# EAGLE board Arduino_Nano_Clock_Divider_pcb1 (EAGLE 9.1.1)
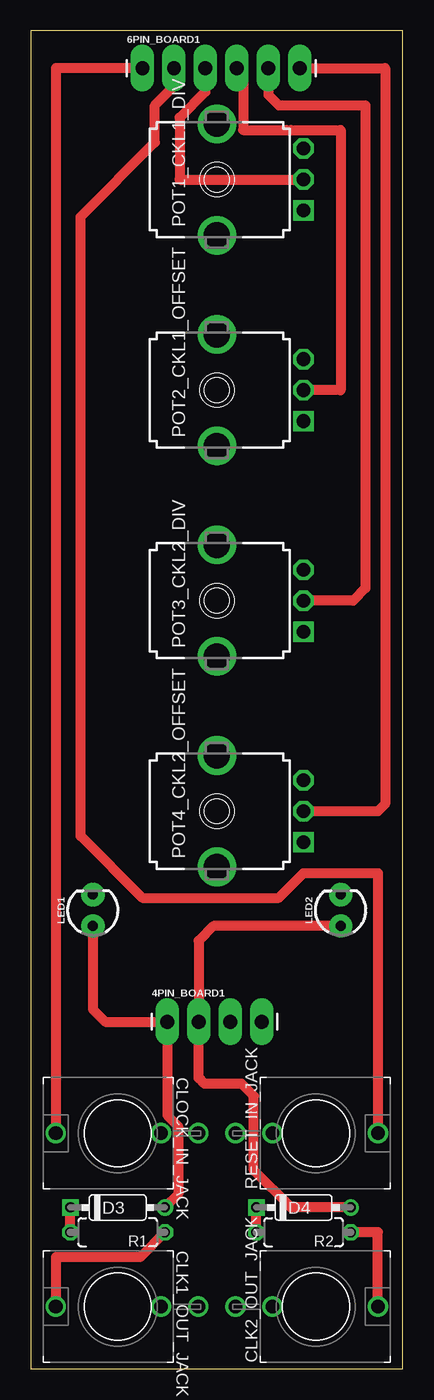
[diagram p0: board, top side]
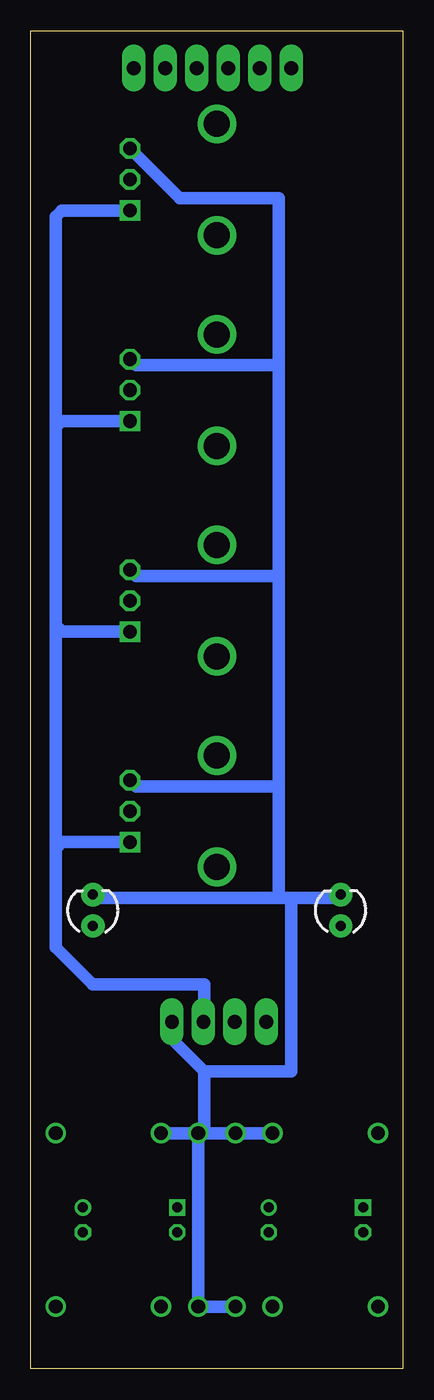
[diagram p1: board, bottom side, seen from below]

Size 30 x 108 mm. Coordinates in mm from the lower left corner, seen from the top.
Outline: 0,0 30,0 30,108 0,108 0,0
Copper layers (1*16): Top 0.035mm / dielectric 1.5mm / Bottom 0.035mm
Design rules "default": minimum track width 6mil, minimum drill 0.35mm, track to track 6mil, track to pad 6mil, pad to pad 6mil, via to via 6mil, smd to smd 6mil, copper to edge 40mil, drill to drill 6mil, minimum pad ring 10mil, minimum via ring 8mil, stop-mask expansion 4mil, vias tented up to drill 0mil, thermal gap 10mil

## Footprints (pad centres in the part's own frame; a part is rotated, then mirrored left to right if it is on the bottom)
1X04_LONGPADS = drill 1.118 pad 1.88 long: 1 0,0; 2 2.54,0; 3 5.08,0; 4 7.62,0
1X06_LONGPADS = drill 1.118 pad 1.88 long: 1 0,0; 2 2.54,0; 3 5.08,0; 4 7.62,0; 5 10.16,0; 6 12.7,0
WQP-PJ301M-12_JACK = drill 1.1: P$1_TIP 0,5; P$2_SWITCH 0,-3.5; P$3_SLEEVE 0,-6.5
DO35-7 = drill 0.813: A 3.81,0 | drill 0.813 square: C -3.81,0
LED_3MM = drill 0.813 pad 1.88: A -1.27,0; K 1.27,0
9MM_SNAP-IN_POT = drill 1.1 square: 1 -2.5,-7 | drill 1.1 octagon: 2 0,-7; 3 2.5,-7 | drill 2.1 pad 2.794: CHASSIS1 -4.5,0; CHASSIS2 4.5,0
7MM_RESISTOR = drill 0.813 octagon: 1 -3.81,0; 2 3.81,0

## Placement (x,y rotation side)
4PIN_BOARD1  [1X04_LONGPADS]  11,28 0 top
6PIN_BOARD1  [1X06_LONGPADS]  9,105 0 top
CLK1_OUT_JACK  THONKICONNNEW  [WQP-PJ301M-12_JACK]  7,5 90 top
CLK2_OUT_JACK  THONKICONNNEW  [WQP-PJ301M-12_JACK]  23,5 270 top
CLOCK_IN_JACK  THONKICONNNEW  [WQP-PJ301M-12_JACK]  7,19 90 top
D3  1N4148  [DO35-7]  7,13 0 top
D4  1N4148  [DO35-7]  22,13 0 top
LED1  [LED_3MM]  5,37 90 top
LED2  [LED_3MM]  25,37 90 top
POT1_CKL1_DIV  100k  [9MM_SNAP-IN_POT]  15,96 90 top
POT2_CKL1_OFFSET  100k  [9MM_SNAP-IN_POT]  15,79 90 top
POT3_CKL2_DIV  100k  [9MM_SNAP-IN_POT]  15,62 90 top
POT4_CKL2_OFFSET  100k  [9MM_SNAP-IN_POT]  15,45 90 top
R1  1k  [7MM_RESISTOR]  7,11 180 top
R2  1k  [7MM_RESISTOR]  22,11 180 top
RESET_IN_JACK  THONKICONNNEW  [WQP-PJ301M-12_JACK]  23,19 270 top

## Library data of the parts
4PIN_BOARD1 = SparkFun-Connectors; PROD_ID: CONN-09696
6PIN_BOARD1 = SparkFun-Connectors
CLK1_OUT_JACK CLK2_OUT_JACK CLOCK_IN_JACK D3 D4 POT1_CKL1_DIV POT2_CKL1_OFFSET POT3_CKL2_DIV POT4_CKL2_OFFSET R1 R2 RESET_IN_JACK = MusicThingModular
LED1 LED2 = SparkFun-LED; PROD_ID: DIO-08794; SPICEPREFIX: L

## Nets
+5VARDUINO: 4PIN_BOARD1.3 POT1_CKL1_DIV.1 POT2_CKL1_OFFSET.1 POT3_CKL2_DIV.1 POT4_CKL2_OFFSET.1
D0: 4PIN_BOARD1.1 D3.A LED1.A
D1: 4PIN_BOARD1.2 D4.A LED2.A
GND_ARDUINO: 4PIN_BOARD1.4 CLK1_OUT_JACK.P$3_SLEEVE CLK2_OUT_JACK.P$3_SLEEVE CLOCK_IN_JACK.P$2_SWITCH CLOCK_IN_JACK.P$3_SLEEVE LED1.K LED2.K POT1_CKL1_DIV.3 POT2_CKL1_OFFSET.3 POT3_CKL2_DIV.3 POT4_CKL2_OFFSET.3 RESET_IN_JACK.P$2_SWITCH RESET_IN_JACK.P$3_SLEEVE
N$1: 6PIN_BOARD1.1 CLOCK_IN_JACK.P$1_TIP
N$2: 6PIN_BOARD1.2 RESET_IN_JACK.P$1_TIP
N$4: D3.C R1.2
N$5: D4.C R2.2
N$6: 6PIN_BOARD1.3 POT1_CKL1_DIV.2
N$7: 6PIN_BOARD1.4 POT2_CKL1_OFFSET.2
N$8: 6PIN_BOARD1.5 POT3_CKL2_DIV.2
N$9: 6PIN_BOARD1.6 POT4_CKL2_OFFSET.2
N$17: CLK2_OUT_JACK.P$1_TIP R2.1
N$18: CLK1_OUT_JACK.P$1_TIP R1.1

## Tracks (layer width: path | path; a pad name or v marks a point on that pad's centre or on a via)
+5VARDUINO
  Bottom 1.016: POT3_CKL2_DIV.1 27.48,59.5 28,60.02 | 4PIN_BOARD1.3 16,28.08 16,31 25,31 28,34 28,42 | 28,76 28,93 27.5,93.5 POT1_CKL1_DIV.1 | POT2_CKL1_OFFSET.1 27.5,76.5 28,76 | POT4_CKL2_OFFSET.1 27.5,42.5 28,42 | 28,60.02 28,76 | 28,60.02 28,42
D0
  Top 0.813: LED1.A 5,29 6,28 4PIN_BOARD1.1 11,20.46 11.88,19.57 11.88,14.07 D3.A
D1
  Top 0.813: D4.A 21,13 18,16 18,22 17,23 14,23 13.54,23.46 13.54,27 4PIN_BOARD1.2 13.54,34.54 14.73,35.73 LED2.A
GND_ARDUINO
  Bottom 1.016: 4PIN_BOARD1.4 18.62,26.62 16,24 | 16,24 9,24 9,37 9,38 | 10,38 10,47 | 10,47 10,64 | 10,64 10,81 | 10,81 10,94.5 18,94.5 POT1_CKL1_DIV.3 | POT2_CKL1_OFFSET.3 21.5,81 10,81 | POT3_CKL2_DIV.3 21.5,64 10,64 | POT4_CKL2_OFFSET.3 21.5,47 10,47 | LED1.K 5.27,38 9,38 | 16,24 16,19.5 RESET_IN_JACK.P$3_SLEEVE | RESET_IN_JACK.P$3_SLEEVE CLK2_OUT_JACK.P$3_SLEEVE CLK1_OUT_JACK.P$3_SLEEVE | RESET_IN_JACK.P$3_SLEEVE CLOCK_IN_JACK.P$3_SLEEVE CLOCK_IN_JACK.P$2_SWITCH | RESET_IN_JACK.P$2_SWITCH RESET_IN_JACK.P$3_SLEEVE | LED2.K 24.73,38 10,38 | 10,38 9,38
N$1
  Top 0.813: 6PIN_BOARD1.1 2,105 CLOCK_IN_JACK.P$1_TIP
N$2
  Top 0.813: 6PIN_BOARD1.2 11.54,103.54 10,102 10,99 4,93 4,91 | 4,91 4,43 9,38 20,38 22,40 28,40 RESET_IN_JACK.P$1_TIP | 4,91
N$4
  Top 0.813: R1.2 D3.C
N$5
  Top 0.813: R2.2 D4.C
N$6
  Top 0.813: POT1_CKL1_DIV.2 12,96 12,101 14.08,103.08 6PIN_BOARD1.3
N$7
  Top 0.813: POT2_CKL1_OFFSET.2 25,79 25,100 21,100 20.64,100 17.12,100 17.12,104.5 6PIN_BOARD1.4
N$8
  Top 0.813: 6PIN_BOARD1.5 19.16,102.84 20,102 27,102 27,63 26,62 POT3_CKL2_DIV.2
N$9
  Top 0.813: 6PIN_BOARD1.6 28.58,105 28.58,45.58 28,45 POT4_CKL2_OFFSET.2
N$17
  Top 0.813: CLK2_OUT_JACK.P$1_TIP 28,11 R2.1
N$18
  Top 0.813: R1.1 8.81,9 2,9 CLK1_OUT_JACK.P$1_TIP